# EAGLE board Sun.withname (EAGLE 7.2.0)
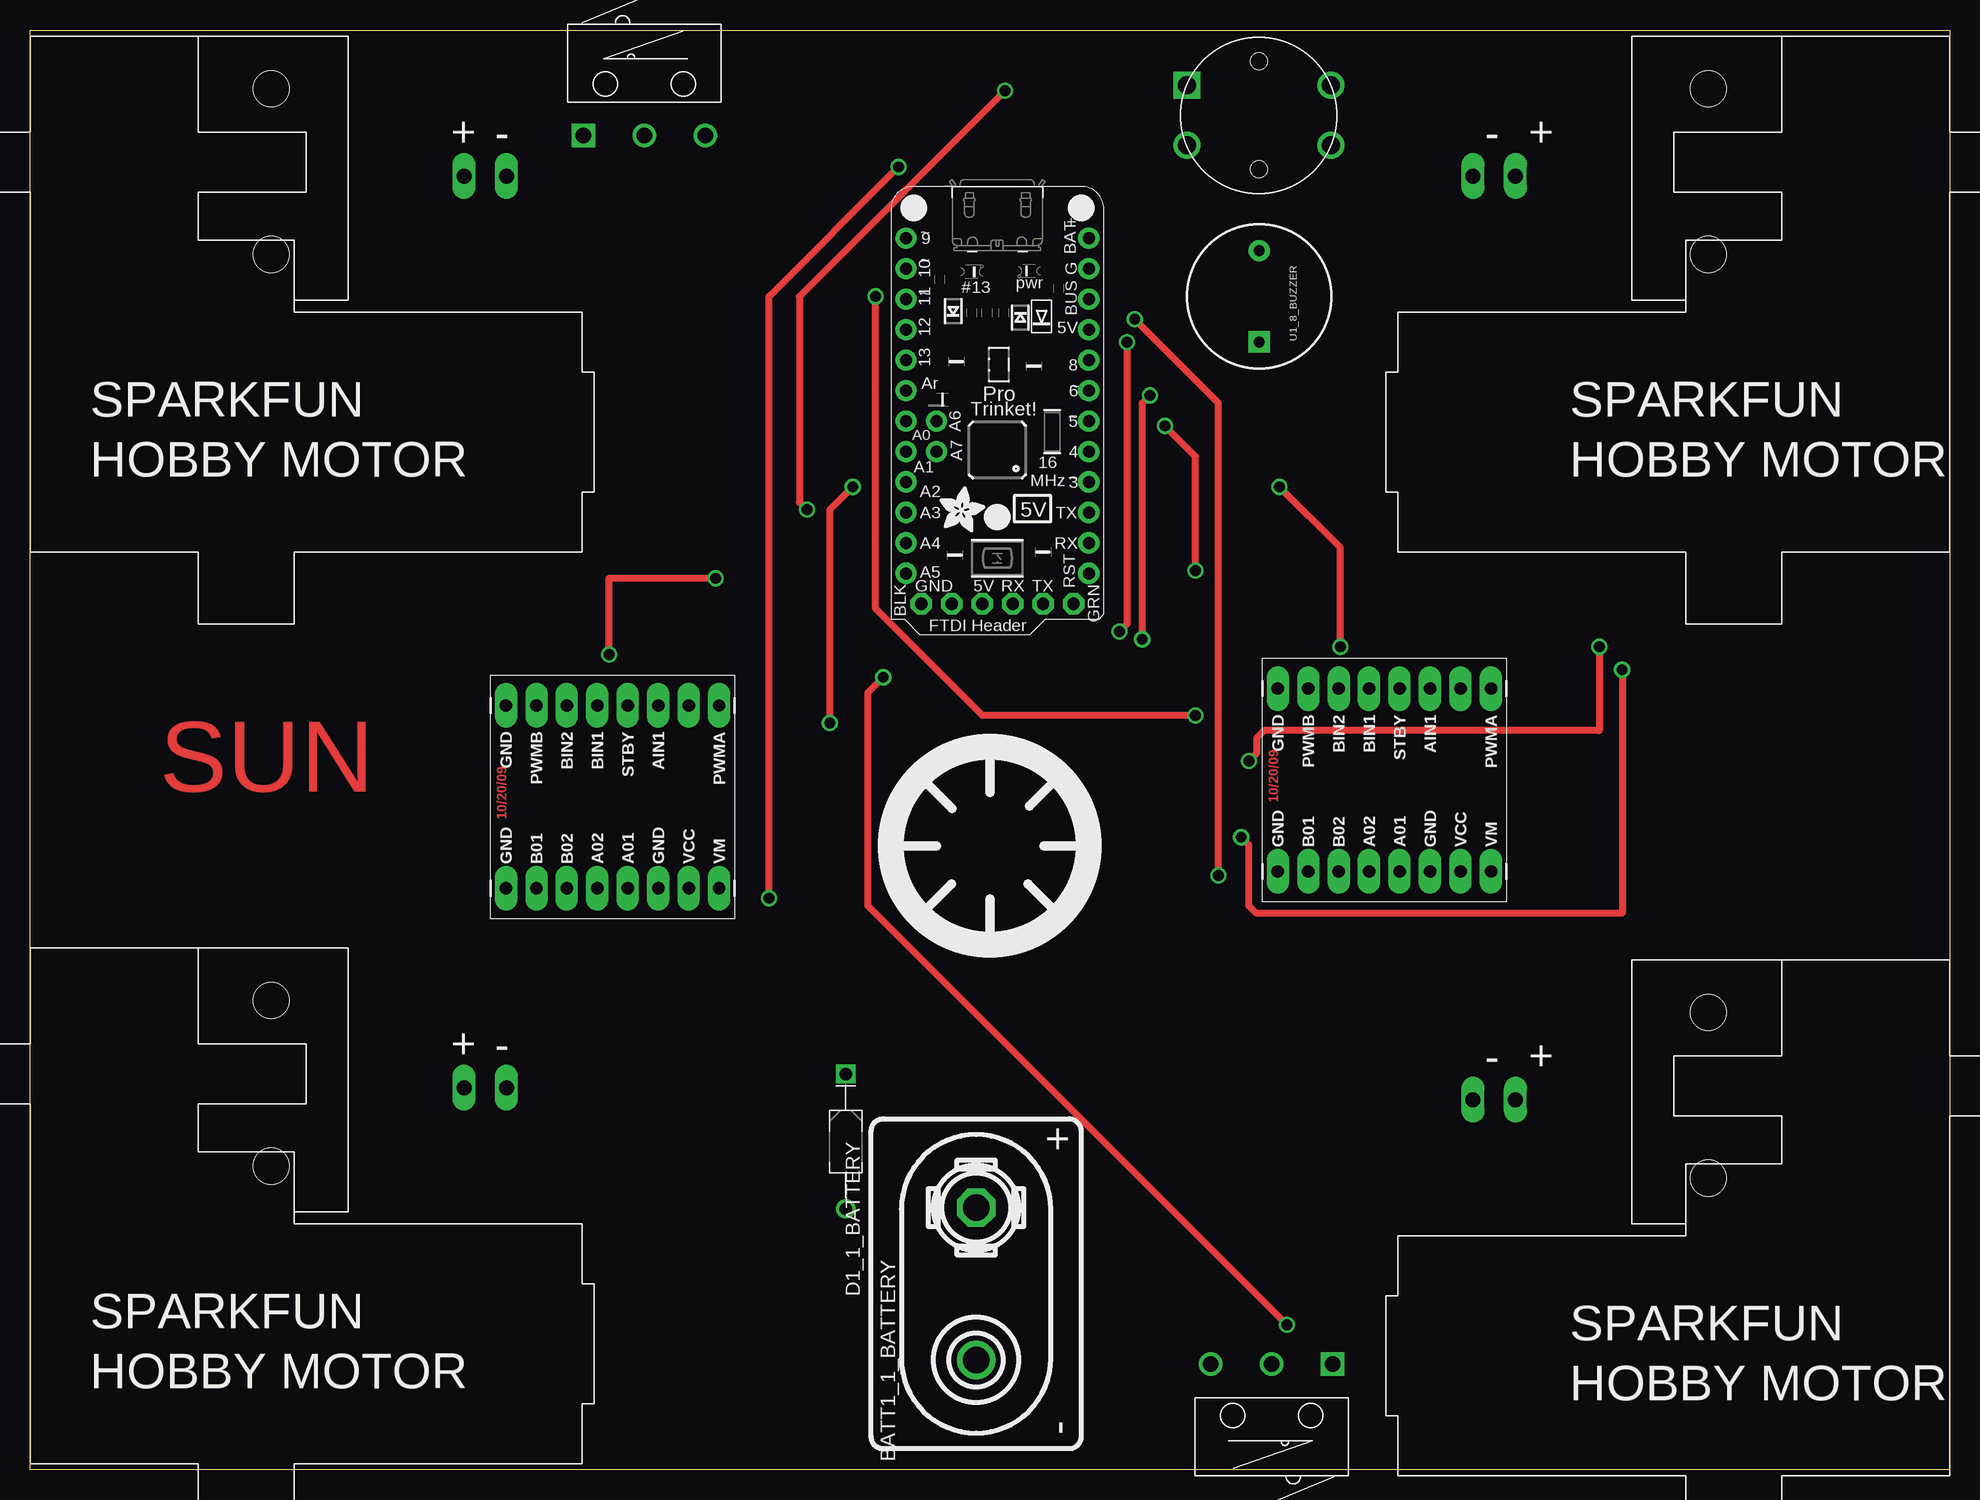
[diagram p0: board, top side]
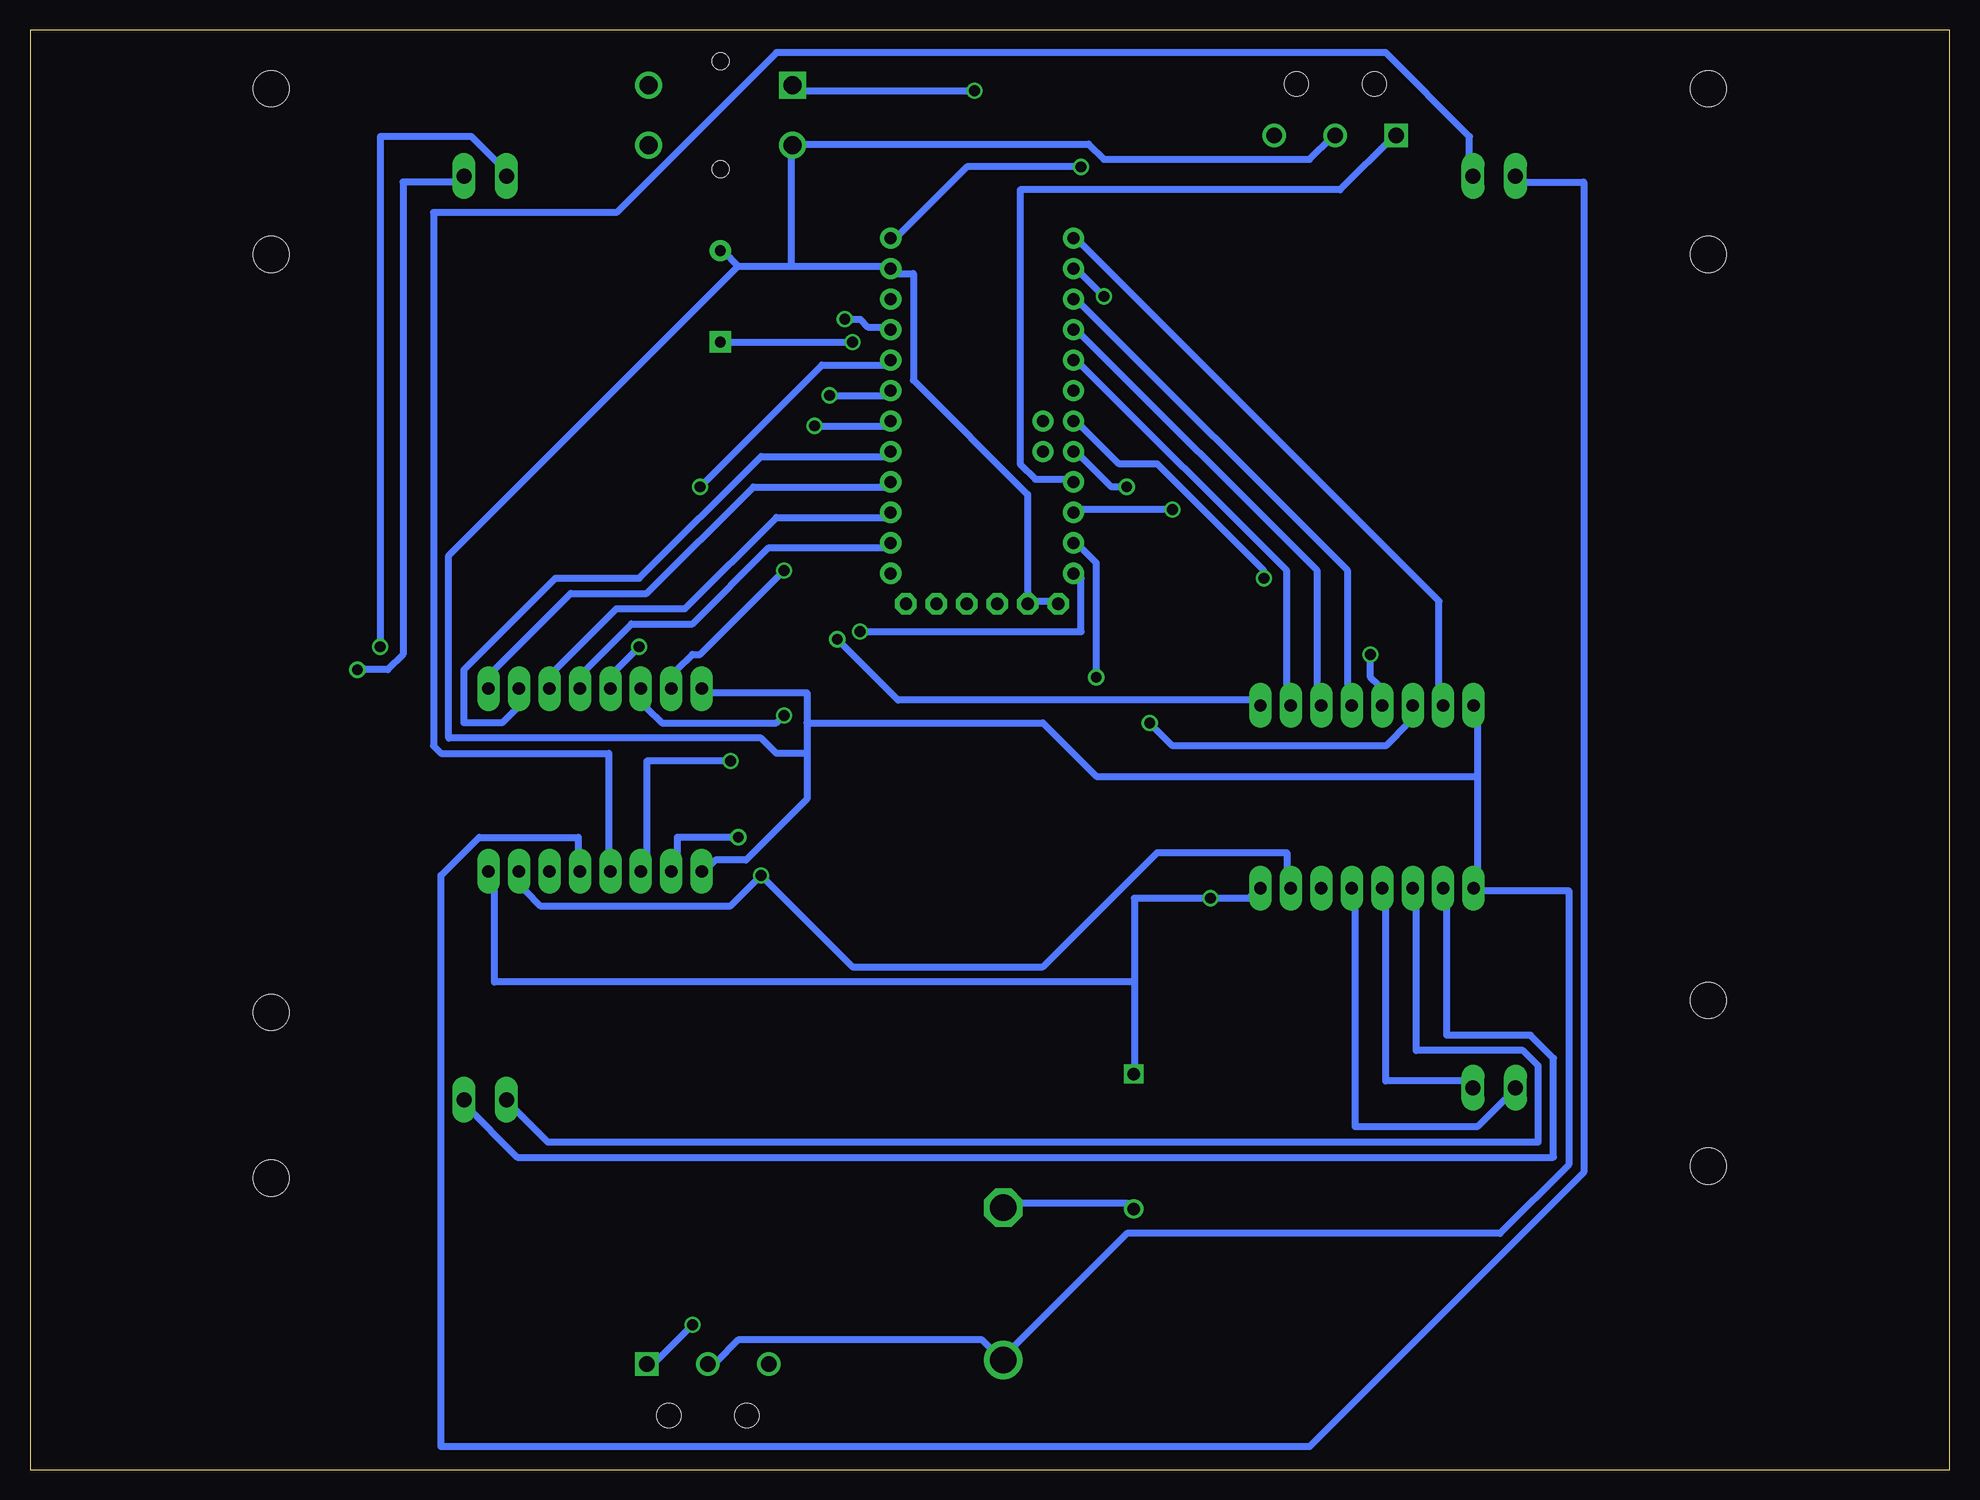
[diagram p1: board, bottom side, seen from below]

Size 160 x 120 mm. Coordinates in mm from the lower left corner, seen from the top.
Outline: 0,0 0,120 160,120 160,0 0,0
Copper layers (1*16): Top 0.035mm / dielectric 1.5mm / Bottom 0.035mm
Design rules "default": minimum track width 0.6mm, minimum drill 0.9mm, track to track 15mil, track to pad 0.6mm, pad to pad 0.5mm, via to via 0.38mm, smd to smd 8mil, copper to edge 40mil, drill to drill 8mil, minimum pad ring 10mil, minimum via ring 8mil, stop-mask expansion 4mil, vias tented up to drill 0mil, thermal gap 10mil
tRestrict: area 100.7,92.2 to 104.2,95.8; area 100.7,99.8 to 104.2,103.4; area 101.6,6.9 to 105.4,10.7; area 102.2,47.1 to 105.8,52.6; area 102.2,62.3 to 105.8,67.9; area 104.7,47.1 to 108.4,52.6; area 104.7,62.3 to 108.4,67.9; area 106.7,6.9 to 110.5,10.7; area 107.2,47.1 to 110.9,52.6; area 107.2,62.3 to 110.9,67.9; area 109.8,47.1 to 113.5,52.6; area 109.8,62.3 to 113.5,67.9; 61 more areas
vRestrict: area -31,-7 to 48.3,67; area -31,69 to 48.3,143; area 102.6,47.3 to 123.2,67.7; area 111.6,-7.6 to 191,66; area 111.6,69.4 to 191,143; area 38.3,45.9 to 58.8,66.3; area 43.5,108.9 to 58.9,126.8; area 66.4,20.6 to 69.6,34; area 68.7,0.3 to 89.1,30.7; area 70.2,42.2 to 89.8,61.8; area 71.7,69.6 to 89.6,107.6; area 94.9,105.9 to 109.9,119.9; 2 more areas

## Footprints (pad centres in the part's own frame; a part is rotated, then mirrored left to right if it is on the bottom)
BUTTON-TACTILE-ROUND-ADAFRUIT1009 = drill 1.5 square: P -6,2.5 | drill 1.5: P2 6,2.5; S -6,-2.5; S2 6,-2.5 | hole 1.4: 0,-4.5; 0,4.5
BATTERY_9V_KEYSTONE_968 = drill 2.2: N 6.35,0 | drill 2.2 octagon: P -6.35,0
DIOAD1125W78L520D270_HS = drill 1.06 pad 1.59: A 5.625,0 | drill 1.06 pad 1.59 square: C -5.625,0
SPARKFUN_DUAL_MOTOR_DRIVER = drill 1.016 pad 1.88 long: A01 7.62,1.27; A02 7.62,-1.27; AIN1 -7.62,3.81; AIN2 -7.62,6.35; B01 7.62,-6.35; B02 7.62,-3.81; BIN1 -7.62,-1.27; BIN2 -7.62,-3.81; GND -7.62,-8.89; GND1 7.62,3.81; GND2 7.62,-8.89; PWMA -7.62,8.89; PWMB -7.62,-6.35; STBY -7.62,1.27; VCC 7.62,6.35; VM 7.62,8.89
SPARKFUN_HOBBY_MOTOR_LEFT = drill 1.27 long: + -41.18,-1.18; - -44.72,-1.18 | hole 3: -25.1,-7.7; -25.1,6.1
SPARKFUN_HOBBY_MOTOR = drill 1.27 long: + 41.18,-1.18; - 44.72,-1.18 | hole 3: 25.1,-7.7; 25.1,6.1
ADAFRUIT-PRO-TRINKET-5V = drill 1.016 pad 1.778: +5V 7.62,24.13; A0 -7.62,16.51; A1 -7.62,13.97; A2 -7.62,11.43; A3 -7.62,8.89; A4 -7.62,6.35; A5 -7.62,3.81; AREF -7.62,19.05; D3 7.62,11.43; D4 7.62,13.97; D5 7.62,16.51; D6 7.62,19.05; D8 7.62,21.59; D9 -7.62,31.75; D10 -7.62,29.21; D11 -7.62,26.67; D12 -7.62,24.13; D13 -7.62,21.59; GND2 7.62,29.21; RESET 7.62,3.81; RXD1 7.62,6.35; TXD1 7.62,8.89; VBAT 7.62,31.75; VBUS1 7.62,26.67 | drill 1 pad 1.778: A6 -5.08,16.51; A7 -5.08,13.97 | drill 1.016 pad 1.778 octagon: DTR/RTS 6.35,1.27; GND -6.35,1.27; GND1 -3.81,1.27; RXD 1.27,1.27; TXD 3.81,1.27; VBUS -1.27,1.27
BUZZER-12MM = drill 0.9 pad 1.778 square: + 3.81,0 | drill 0.9 pad 1.778: - -3.81,0
BUMP_SWITCH_OMRON_D2FLA1 = drill 1.3 square: A -5.08,-2.8 | drill 1.3: B 0,-2.8; NC 5.08,-2.8 | hole 2: -3.25,1.5; 3.25,1.5

## Placement (x,y rotation side)
B1_6_BUTTON  BUTTON-TACTILE-ROUND  [BUTTON-TACTILE-ROUND-ADAFRUIT1009]  102.42,112.88 0 top
BATT1_1_BATTERY  BATTERY-9V-VERTICAL  [BATTERY_9V_KEYSTONE_968]  78.86,15.48 270 top
D1_1_BATTERY  [DIOAD1125W78L520D270_HS]  68,27.34 270 top
DRVR_2_DRIVE  SPARKFUN_DUAL_MOTOR_DRIVER-BOB  [SPARKFUN_DUAL_MOTOR_DRIVER]  112.89,57.48 270 top
DRVR_3_DRIVE_2  SPARKFUN_DUAL_MOTOR_DRIVER-BOB  [SPARKFUN_DUAL_MOTOR_DRIVER]  48.56,56.07 270 top
L_2_DRIVE  SOLARBOTICS_GM2_LEFTSPARKFUN_HOBBY  [SPARKFUN_HOBBY_MOTOR_LEFT]  165,109 0 top
L_3_DRIVE_2  SOLARBOTICS_GM2_LEFTSPARKFUN_HOBBY  [SPARKFUN_HOBBY_MOTOR_LEFT]  165,32 0 top
R_2_DRIVE  SOLARBOTICS_GM2SPARKFUN_HOBBY  [SPARKFUN_HOBBY_MOTOR]  -5,109 0 top
R_3_DRIVE_2  SOLARBOTICS_GM2SPARKFUN_HOBBY  [SPARKFUN_HOBBY_MOTOR]  -5,33 0 top
U1_0_BRAIN  [ADAFRUIT-PRO-TRINKET-5V]  80.64,70.89 0 top
U1_4_PENHOLDER  [PENHOLDER]  80,52 0 top
U1_8_BUZZER  [BUZZER-12MM]  102.46,97.8 270 top
U$2_5_BUMP  BUMP_SWITCH-MEDIUM-RIGHT  [BUMP_SWITCH_OMRON_D2FLA1]  51.2,114 0 top
U$2_7_BUMP_2  BUMP_SWITCH-MEDIUM-RIGHT  [BUMP_SWITCH_OMRON_D2FLA1]  103.5,6 180 top

## Library data of the parts
B1_6_BUTTON BATT1_1_BATTERY L_2_DRIVE L_3_DRIVE_2 R_2_DRIVE R_3_DRIVE_2 U1_4_PENHOLDER U1_8_BUZZER U$2_5_BUMP U$2_7_BUMP_2 = Components
D1_1_BATTERY = KoalaBuild; DATASHEET: http://www.st.com/web/en/resource/technical/document/datasheet/CD00001625.pdf; DB: /Users/sciencectn/Documents/nvsl/Gadgets/Tools/Koala/Koala/PartLibrary/Digikey/Schottky-Diodes-TH.csv; DEVICE: TH-DO-41-AND-DO-204AL; DIST: Digikey; DISTPN: 497-4547-1-ND; IMAGE: http://media.digikey.com/photos/STMicro%20Photos/1N5819.JPG; IRECT: 1A; MFR: STMicroelectronics; MIN_QTY: 1; MPN: 1N5817; PACKAGE: DIOAD1125W78L520D270_HS; PRICE: $0.57; SIZE: TH; STOCK: STOCK; VALUE: 450mV; VREV: 20V
DRVR_2_DRIVE DRVR_3_DRIVE_2 U1_0_BRAIN = BOBs

## Nets
+5V_0_BRAIN: DRVR_2_DRIVE.VCC DRVR_3_DRIVE_2.VCC U1_0_BRAIN.+5V
A0_0_BRAIN: DRVR_3_DRIVE_2.BIN1 U1_0_BRAIN.A0
A1_0_BRAIN: DRVR_3_DRIVE_2.BIN2 U1_0_BRAIN.A1
A01_2_DRIVE: DRVR_2_DRIVE.A01 R_2_DRIVE.+
A01_3_DRIVE_2: DRVR_3_DRIVE_2.A01 R_3_DRIVE_2.+
A2_0_BRAIN: U1_0_BRAIN.A2 U$2_5_BUMP.A
A02_2_DRIVE: DRVR_2_DRIVE.A02 R_2_DRIVE.-
A02_3_DRIVE_2: DRVR_3_DRIVE_2.A02 R_3_DRIVE_2.-
A3_0_BRAIN: B1_6_BUTTON.P U1_0_BRAIN.A3
A4_0_BRAIN: U1_0_BRAIN.A4 U$2_7_BUMP_2.A
A5_0_BRAIN: U1_0_BRAIN.A5 U1_8_BUZZER.+
A6_0_BRAIN: U1_0_BRAIN.A6
A7_0_BRAIN: U1_0_BRAIN.A7
AREF_0_BRAIN: U1_0_BRAIN.AREF
B01_2_DRIVE: DRVR_2_DRIVE.B01 L_2_DRIVE.+
B01_3_DRIVE_2: DRVR_3_DRIVE_2.B01 L_3_DRIVE_2.+
B02_2_DRIVE: DRVR_2_DRIVE.B02 L_2_DRIVE.-
B02_3_DRIVE_2: DRVR_3_DRIVE_2.B02 L_3_DRIVE_2.-
D3_0_BRAIN: DRVR_2_DRIVE.PWMA U1_0_BRAIN.D3
D4_0_BRAIN: DRVR_2_DRIVE.AIN2 U1_0_BRAIN.D4
D5_0_BRAIN: DRVR_2_DRIVE.PWMB U1_0_BRAIN.D5
D6_0_BRAIN: DRVR_3_DRIVE_2.PWMA U1_0_BRAIN.D6
D8_0_BRAIN: DRVR_2_DRIVE.BIN1 U1_0_BRAIN.D8
D9_0_BRAIN: DRVR_3_DRIVE_2.PWMB U1_0_BRAIN.D9
D10_0_BRAIN: DRVR_2_DRIVE.BIN2 U1_0_BRAIN.D10
D11_0_BRAIN: DRVR_3_DRIVE_2.STBY U1_0_BRAIN.D11
D12_0_BRAIN: DRVR_3_DRIVE_2.AIN1 U1_0_BRAIN.D12
D13_0_BRAIN: DRVR_3_DRIVE_2.AIN2 U1_0_BRAIN.D13
DTR/RTS_0_BRAIN: U1_0_BRAIN.DTR/RTS
GND1_2_DRIVE: DRVR_2_DRIVE.GND1
GND1_3_DRIVE_2: DRVR_3_DRIVE_2.GND1
GND2_0_BRAIN: B1_6_BUTTON.S BATT1_1_BATTERY.N DRVR_2_DRIVE.GND DRVR_2_DRIVE.GND2 DRVR_3_DRIVE_2.GND DRVR_3_DRIVE_2.GND2 U1_0_BRAIN.GND U1_0_BRAIN.GND1 U1_0_BRAIN.GND2 U1_8_BUZZER.- U$2_5_BUMP.B U$2_7_BUMP_2.B
N$1_1_BATTERY: BATT1_1_BATTERY.P D1_1_BATTERY.A
RESET_0_BRAIN: U1_0_BRAIN.RESET
RXD1_0_BRAIN: DRVR_2_DRIVE.STBY U1_0_BRAIN.RXD1
RXD_0_BRAIN: U1_0_BRAIN.RXD
TXD1_0_BRAIN: DRVR_2_DRIVE.AIN1 U1_0_BRAIN.TXD1
TXD_0_BRAIN: U1_0_BRAIN.TXD
VBUS1_0_BRAIN: U1_0_BRAIN.VBUS1
VBUS_0_BRAIN: U1_0_BRAIN.VBUS
VM_2_DRIVE: D1_1_BATTERY.C DRVR_2_DRIVE.VM DRVR_3_DRIVE_2.VM U1_0_BRAIN.VBAT

## Tracks (layer width: path | path; a pad name or v marks a point on that pad's centre or on a via)
+5V_0_BRAIN  (via drill 0.9)
  Top 0.6: v99.06,49.53 99.06,88.9 v92.08,95.89
  Bottom 0.6: DRVR_2_DRIVE.VCC 118.75,49.53 118.75,48.26 117.47,46.99 101.6,46.99 v99.06,49.53 91.44,41.91 75.56,41.91 66.04,51.44 55.24,51.44 55.24,48.9 DRVR_3_DRIVE_2.VCC | U1_0_BRAIN.+5V 88.27,95.25 90.17,95.25 90.81,95.89 v92.08,95.89
A0_0_BRAIN  (via drill 0.9)
  Top 0.6: v48.26,67.94 48.26,74.3 v57.15,74.3
  Bottom 0.6: DRVR_3_DRIVE_2.BIN1 47.62,64.14 47.62,65.41 48.26,66.04 v48.26,67.94 | v57.15,74.3 57.15,74.93 66.04,83.82 69.22,83.82 72.39,87 U1_0_BRAIN.A0
A1_0_BRAIN  (via drill 0.9)
  Top 0.6: v66.67,62.23 66.67,80.01 v68.58,81.92
  Bottom 0.6: DRVR_3_DRIVE_2.BIN2 45.09,63.5 45.09,62.23 46.99,60.33 64.77,60.33 v66.67,62.23 | v68.58,81.92 69.85,81.92 72.39,84.45 U1_0_BRAIN.A1
A01_2_DRIVE
  Bottom 0.6: DRVR_2_DRIVE.A01 114.3,50.16 114.3,52.7 122.56,52.7 125.73,49.53 125.73,1.91 53.34,1.91 30.48,24.77 30.48,107.31 35.56,107.31 R_2_DRIVE.+
A01_3_DRIVE_2
  Bottom 0.6: R_3_DRIVE_2.+ 36.2,31.75 39.37,28.57 49.53,28.57 49.53,48.26 DRVR_3_DRIVE_2.A01
A2_0_BRAIN
  Bottom 0.6: U$2_5_BUMP.A 46.35,111.12 50.8,106.68 77.47,106.68 77.47,83.82 76.2,82.55 73.03,82.55 U1_0_BRAIN.A2
A02_2_DRIVE
  Bottom 0.6: DRVR_2_DRIVE.A02 111.76,50.16 111.76,59.69 125.73,59.69 126.36,60.33 126.36,104.78 111.12,104.78 97.79,118.11 46.99,118.11 40.01,111.12 40.01,107.95 R_2_DRIVE.-
A02_3_DRIVE_2
  Bottom 0.6: R_3_DRIVE_2.- 40.01,32.38 46.99,32.38 46.99,48.26 DRVR_3_DRIVE_2.A02
A3_0_BRAIN  (via drill 0.9)
  Top 0.6: v64.77,80.01 64.14,80.64 64.14,97.79 v81.28,114.94
  Bottom 0.6: v64.77,80.01 72.39,80.01 U1_0_BRAIN.A3 | v81.28,114.94 95.89,114.94 B1_6_BUTTON.P
A4_0_BRAIN  (via drill 0.9)
  Top 0.6: v104.78,12.06 69.85,46.99 69.85,64.77 v71.12,66.04
  Bottom 0.6: v104.78,12.06 107.95,8.89 U$2_7_BUMP_2.A | v71.12,66.04 71.12,75.56 72.39,76.83 U1_0_BRAIN.A4
A5_0_BRAIN  (via drill 0.9)
  Top 0.6: v90.81,69.85 91.44,70.48 v91.44,93.98
  Bottom 0.6: U1_8_BUZZER.+ 102.23,93.98 v91.44,93.98 | U1_0_BRAIN.A5 72.39,74.3 72.39,69.85 v90.81,69.85
B01_2_DRIVE  (via drill 0.9)
  Top 0.6: v100.97,52.7 101.6,52.07 101.6,46.99 102.23,46.35 132.72,46.35 v132.72,66.67
  Bottom 0.6: v100.97,52.7 106.05,52.7 106.05,50.16 DRVR_2_DRIVE.B01 | L_2_DRIVE.+ 123.83,107.31 128.91,107.31 128.91,67.94 130.18,66.67 v132.72,66.67
B01_3_DRIVE_2
  Bottom 0.6: L_3_DRIVE_2.+ 123.83,30.48 119.38,26.04 33.02,26.04 33.02,34.29 34.92,36.2 41.91,36.2 41.91,48.26 DRVR_3_DRIVE_2.B01
B02_2_DRIVE  (via drill 0.9)
  Top 0.6: v101.6,59.05 102.23,59.69 102.23,60.96 102.87,61.59 130.81,61.59 v130.81,68.58
  Bottom 0.6: v101.6,59.05 108.58,59.05 108.58,50.16 DRVR_2_DRIVE.B02 | L_2_DRIVE.- 120.02,107.95 123.19,111.12 130.81,111.12 v130.81,68.58
B02_3_DRIVE_2
  Bottom 0.6: L_3_DRIVE_2.- 120.02,30.48 116.84,27.3 34.29,27.3 34.29,33.66 35.56,34.92 44.45,34.92 44.45,48.26 DRVR_3_DRIVE_2.B02
D3_0_BRAIN
  Bottom 0.6: DRVR_2_DRIVE.PWMA 121.28,65.41 121.28,66.67 114.94,73.03 108.58,73.03 99.69,81.92 88.27,81.92 U1_0_BRAIN.D3
D4_0_BRAIN
  Bottom 0.6: DRVR_2_DRIVE.AIN2 119.38,64.77 119.38,63.5 120.65,62.23 123.83,62.23 123.83,66.67 116.2,74.3 109.22,74.3 99.06,84.45 88.27,84.45 U1_0_BRAIN.D4
D5_0_BRAIN  (via drill 0.9)
  Top 0.6: v97.16,74.93 97.16,84.45 v94.61,87
  Bottom 0.6: v97.16,74.93 104.14,67.94 104.78,67.94 106.05,66.67 106.05,65.41 DRVR_2_DRIVE.PWMB | U1_0_BRAIN.D5 88.27,87 v94.61,87
D6_0_BRAIN  (via drill 0.9)
  Top 0.6: v92.71,69.22 92.71,88.9 v93.34,89.53
  Bottom 0.6: DRVR_3_DRIVE_2.PWMA 57.78,64.14 87.63,64.14 v92.71,69.22 | U1_0_BRAIN.D6 88.27,89.53 v93.34,89.53
D8_0_BRAIN  (via drill 0.9)
  Top 0.6: v109.22,68.58 109.22,76.83 v104.14,81.92
  Bottom 0.6: v104.14,81.92 93.98,92.08 88.27,92.08 U1_0_BRAIN.D8 | DRVR_2_DRIVE.BIN1 111.12,65.41 111.12,66.67 v109.22,68.58
D9_0_BRAIN
  Bottom 0.6: DRVR_3_DRIVE_2.PWMB 42.55,64.14 42.55,72.39 72.39,102.23 U1_0_BRAIN.D9
D10_0_BRAIN  (via drill 0.9)
  Top 0.6: v70.48,97.79 70.48,71.75 79.38,62.87 v97.16,62.87
  Bottom 0.6: DRVR_2_DRIVE.BIN2 108.58,64.77 108.58,63.5 107.31,62.23 97.79,62.23 v97.16,62.87 | v70.48,97.79 72.39,99.69 U1_0_BRAIN.D10
D11_0_BRAIN
  Bottom 0.6: DRVR_3_DRIVE_2.STBY 50.16,64.14 50.16,74.93 72.39,97.16 U1_0_BRAIN.D11
D12_0_BRAIN
  Bottom 0.6: DRVR_3_DRIVE_2.AIN1 52.7,64.14 52.7,74.93 72.39,94.61 U1_0_BRAIN.D12
D13_0_BRAIN
  Bottom 0.6: DRVR_3_DRIVE_2.AIN2 55.24,64.14 55.24,74.93 72.39,92.08 U1_0_BRAIN.D13
GND2_0_BRAIN
  Bottom 0.6: 100.97,100.33 96.52,100.33 | 100.97,100.33 102.23,101.6 U1_8_BUZZER.- | U$2_7_BUMP_2.B 102.87,8.89 100.97,10.79 80.64,10.79 79.38,9.53 BATT1_1_BATTERY.N 78.74,9.53 68.58,19.68 37.47,19.68 31.75,25.4 31.75,48.26 39.37,48.26 DRVR_3_DRIVE_2.GND2 39.37,48.9 39.37,57.78 | DRVR_2_DRIVE.GND2 103.5,50.16 102.87,50.8 100.33,50.8 95.25,55.88 95.25,59.69 | DRVR_2_DRIVE.GND 103.5,64.77 95.25,64.77 95.25,62.23 | 100.97,100.33 125.09,76.2 125.09,60.96 99.06,60.96 97.79,59.69 95.25,59.69 | 39.37,57.78 39.37,63.5 DRVR_3_DRIVE_2.GND | U$2_5_BUMP.B 51.44,111.12 53.34,109.22 70.48,109.22 71.75,110.49 95.89,110.49 B1_6_BUTTON.S 96.52,109.86 96.52,100.33 | 39.37,57.78 71.12,57.78 75.56,62.23 95.25,62.23 | U1_0_BRAIN.GND 74.3,72.39 76.2,72.39 U1_0_BRAIN.GND1 76.83,72.39 76.83,81.28 86.36,90.81 86.36,99.69 87.63,99.69 U1_0_BRAIN.GND2 88.27,100.33 96.52,100.33 | 95.25,62.23 95.25,59.69
N$1_1_BATTERY
  Bottom 0.6: D1_1_BATTERY.A 68.58,22.23 78.74,22.23 BATT1_1_BATTERY.P
RXD1_0_BRAIN
  Bottom 0.6: DRVR_2_DRIVE.STBY 113.67,65.41 113.67,66.67 109.86,70.48 104.78,70.48 98.42,76.83 88.27,76.83 U1_0_BRAIN.RXD1
TXD1_0_BRAIN
  Bottom 0.6: DRVR_2_DRIVE.AIN1 116.2,65.41 116.2,66.67 111.12,71.75 105.41,71.75 97.79,79.38 88.27,79.38 U1_0_BRAIN.TXD1
VM_2_DRIVE  (via drill 0.9)
  Top 0.6: v61.59,47.62 61.59,97.79 v72.39,108.58
  Bottom 0.6: DRVR_2_DRIVE.VM 121.28,49.53 121.28,40.64 67.94,40.64 | DRVR_3_DRIVE_2.VM 57.78,48.26 58.42,47.62 v61.59,47.62 67.94,47.62 67.94,40.64 | D1_1_BATTERY.C 67.94,33.02 67.94,40.64 | v72.39,108.58 81.92,108.58 87.63,102.87 U1_0_BRAIN.VBAT

## Text on the board
Top: SUN